# Altium PCB final pedal axial 03.PcbDoc
Units mm, origin at the board's own origin, x right, y up, seen from the top; angles counter-clockwise.
Board outline 77.25 x 121.25 mm, 2 copper layers (Top Layer, Bottom Layer); 65 components, 53 nets, 200 pads, 0 vias.
Unrouted connection lines stored in the file: 136.
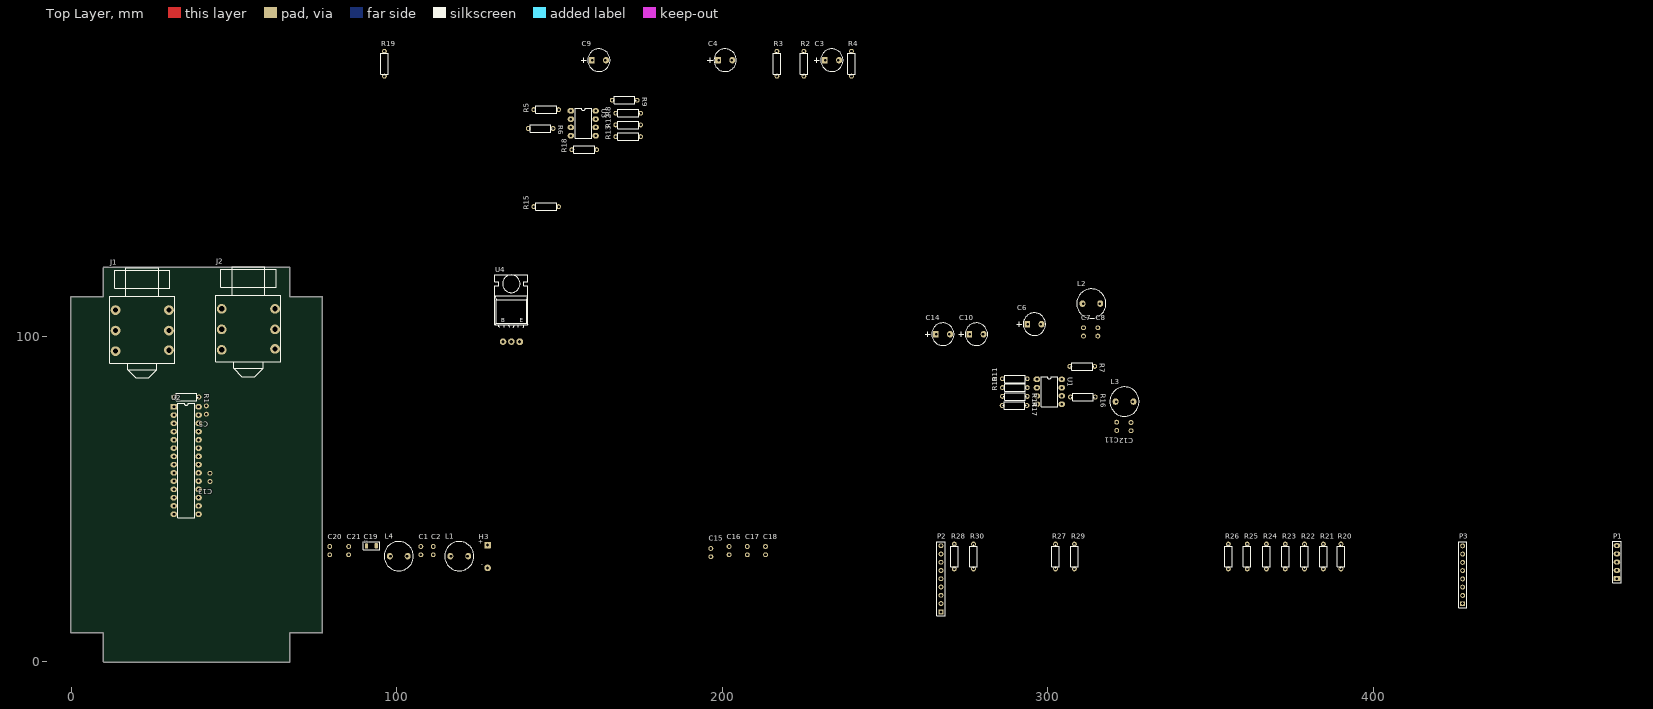
[diagram p0: Top Layer view]
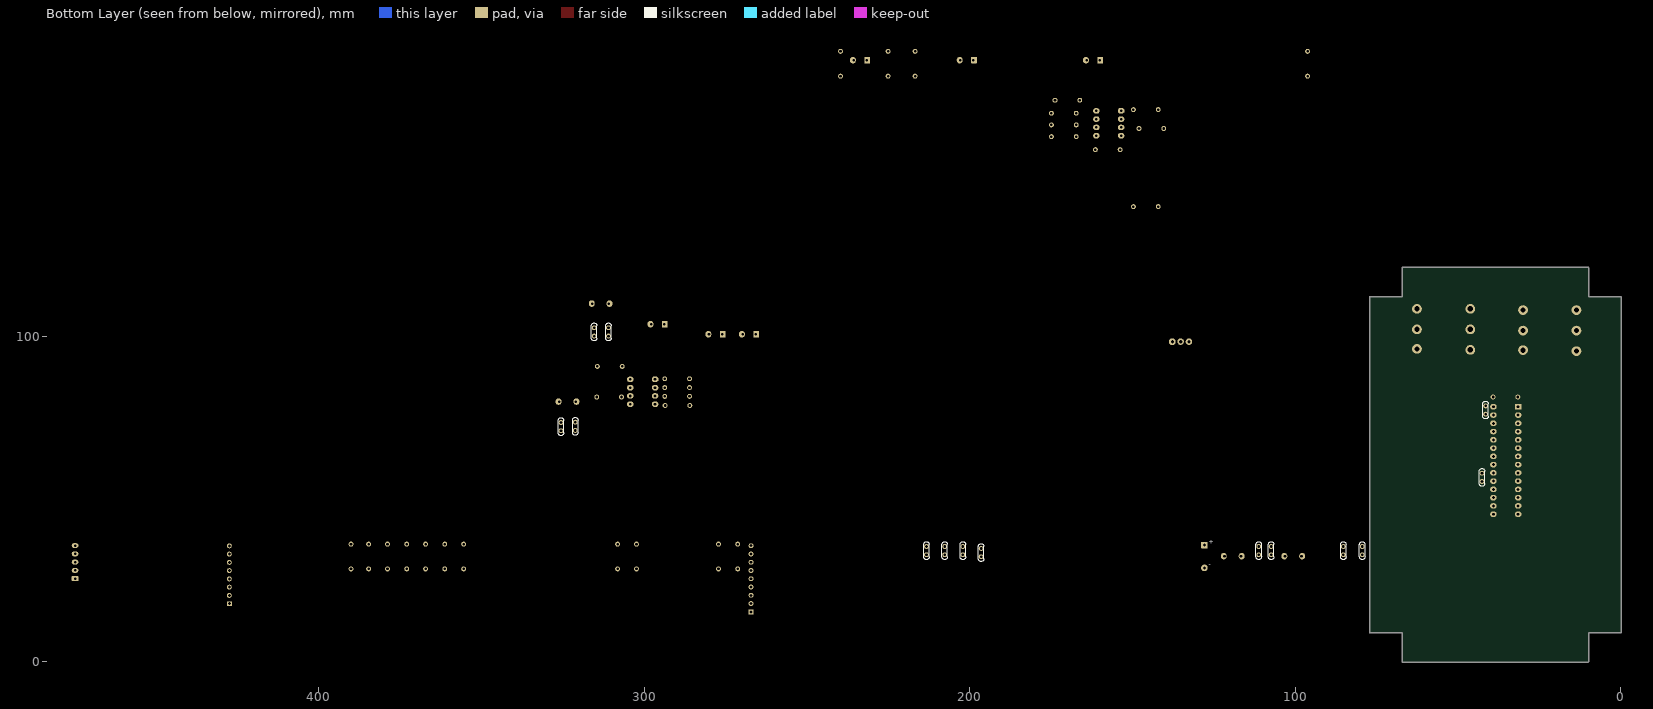
[diagram p1: Bottom Layer view, seen from below]

## Layer stack, top to bottom
Top Solder: solder mask 0.0102, Solder Resist, Dk 3.5
Top Layer: signal copper 0.0356
Dielectric 1: dielectric 0.32, FR-4, Dk 4.8
Bottom Layer: signal copper 0.0356
Bottom Solder: solder mask 0.0102, Solder Resist, Dk 3.5

## Board outline
9.873,0 9.873,8.873 0,8.873 cw(c0,9) -0.127,9 -0.127,112 cw(c0,112) 0,112.127 9.873,112.127 9.873,121 cw(c10,121) 10,121.127 67,121.127 cw(c67,121) 67.127,121 67.127,112.127 77,112.127 cw(c77,112) 77.127,112 77.127,9 cw(c77,9) 77,8.873 67.127,8.873 67.127,0 cw(c67,0) 67,-0.127 10,-0.127 cw(c10,0)

## Design rules (kind name [scope] priority, off if disabled: settings)
Clearance Clearance_1 [InNet('No Net') vs InNet('No Net')] p1: gap=1
Clearance [InNet('GND')] p2: gap=0.4
PlaneClearance [All] p1: clearance=0.3
PlaneConnect [All] p1: planeconnectstyle=Direct reliefexpansion=0.508 reliefentries=4 reliefconductorwidth=0.254 reliefairgap=0.254
PolygonConnect [All] p1: connectstyle=Relief reliefconductorwidth=0.6 reliefentries=4 polygonreliefangle="90 Angle" airgapwidth=0.254
RoutingVias [All] p1: holewidth=0.711 width=1.27 viastyle="Through Hole" minholewidth=0.711 minwidth=1.27 maxholewidth=0.711 maxwidth=1.27
SolderMaskExpansion [All] p1: expansion=0.102
Width [All] p1: maxlimit=0.4 minlimit=0.4 preferedwidth=0.4
28 further rules are at their usual default settings.

## Components (designator, comment, footprint, x,y, rotation, side; value= is the part's Value field where it differs from the comment)
C1 "100n" Cap-Disk-D5.5-R2.54 107.4,34.1 r90 top
C2 "100n" Cap-Disk-D5.5-R2.54 111.2,34.1 r90 top
C3 "10µ" CAPAE250P680X1220_VERT 233.699,184.8 r0 top
C4 "10µ" CAPAE250P680X1220_VERT 200.899,184.8 r0 top
C5 "100n" Cap-Disk-D5.5-R2.54 41.5,77.3 r270 top
C6 "10µ" CAPAE250P680X1220_VERT 295.9,103.7 r0 top
C7 "100n" Cap-Disk-D5.5-R2.54 310.999,101.3 r90 top
C8 "100n" Cap-Disk-D5.5-R2.54 315.399,101.3 r90 top
C9 "10µ" CAPAE250P680X1220_VERT 162.099,184.8 r0 top
C10 "10µ" CAPAE250P680X1220_VERT 278.099,100.6 r0 top
C11 "100n" Cap-Disk-D5.5-R2.54 321.2,72.3 r270 top
C12 "100n" Cap-Disk-D5.5-R2.54 325.6,72.2 r270 top
C13 "100n" Cap-Disk-D5.5-R2.54 42.6,56.6 r270 top
C14 "10µ" CAPAE250P680X1220_VERT 267.799,100.6 r0 top
C15 "100n" Cap-Disk-D5.5-R2.54 196.5,33.5 r90 top
C16 "100n" Cap-Disk-D5.5-R2.54 202.1,34.1 r90 top
C17 "100n" Cap-Disk-D5.5-R2.54 207.7,34.1 r90 top
C18 "100n" Cap-Disk-D5.5-R2.54 213.3,34.1 r90 top
C19 "10µ" R1206-1% 92.2,35.6 r0 top
C20 "100n" Cap-Disk-D5.5-R2.54 79.4,34.1 r90 top
C21 "100n" Cap-Disk-D5.5-R2.54 85.2,34.1 r90 top
H3 "BATTERY" HDR_1X2X276 127.9,32.3 r0 top
J1 "Phone-Jack 6.3mm Stereo SW" "Phone-Jack Stereo SW 6.3mm" 21.8,112.2 r0 top
J2 "Phone-Jack 6.3mm Stereo SW" "Phone-Jack Stereo SW 6.3mm" 54.4,112.6 r0 top
L1 "INDC_180u_Toroid" Dr-CW8A 119.2,32.4 r0 top
L2 "INDC_180u_Toroid" Dr-CW8A 313.4,110 r0 top
L3 "INDC_180u_Toroid" Dr-CW8A 323.6,79.9 r0 top
L4 "INDC_180u_Toroid" Dr-CW8A 100.6,32.4 r0 top
P1 "Programmer" HDR1X5_2.54MMP 474.899,25.5 r90 top
P2 "Header 9" HDR1X9 267.199,15.3 r90 top
P3 "Header 8" HDR1X8 427.499,17.8 r90 top
R1 "Thick Film" R0.25-300 35.4,81.3 r0 top
R2 "Thick Film" R0.25-300 225.099,183.7 r90 top
R3 "Thick Film" R0.25-300 216.799,183.7 r90 top
R4 "Thick Film" R0.25-300 239.699,183.7 r90 top
R5 "Thick Film" R0.25-300 145.9,169.6 r180 top
R6 "Thick Film" R0.25-300 144.2,163.8 r0 top
R7 "Thick Film" R0.25-300 310.6,90.7 r0 top
R8 "Thick Film" R0.25-300 171.1,168.5 r180 top
R9 "Thick Film" R0.25-300 170,172.5 r0 top
R10 "Thick Film" R0.25-300 289.9,84.2 r180 top
R11 "Thick Film" R0.25-300 289.9,86.9 r180 top
R12 "Thick Film" R0.25-300 171.1,164.9 r180 top
R13 "Thick Film" R0.25-300 171.1,161.3 r180 top
R14 "Thick Film" R0.25-300 289.9,81.5 r0 top
R15 "Thick Film" R0.25-300 145.9,139.8 r180 top
R16 "Thick Film" R0.25-300 310.8,81.3 r0 top
R17 "Thick Film" R0.25-300 289.8,78.7 r0 top
R18 "Thick Film" R0.25-300 157.6,157.3 r180 top
R19 "Thick Film" R0.25-300 96.199,183.7 r90 top
R20 "Thick Film" R0.25-300 390.099,32.3 r90 top
R21 "Thick Film" R0.25-300 384.699,32.3 r90 top
R22 "Thick Film" R0.25-300 378.899,32.3 r90 top
R23 "Thick Film" R0.25-300 372.999,32.3 r90 top
R24 "Thick Film" R0.25-300 367.199,32.3 r90 top
R25 "Thick Film" R0.25-300 361.299,32.3 r90 top
R26 "Thick Film" R0.25-300 355.499,32.3 r90 top
R27 "Thick Film" R0.25-300 302.399,32.3 r90 top
R28 "Thick Film" R0.25-300 271.299,32.3 r90 top
R29 "Thick Film" R0.25-300 308.199,32.3 r90 top
R30 "Thick Film" R0.25-300 277.199,32.3 r90 top
U1 "OPA2350" DIL8-300a 300.5,82.9 r270 top
U2 "DSPIC33FJ128GP802-I/SP" DIP28-300 35.3,61.8 r0 top
U3 "OPA2350" DIL8-300a 157.3,165.4 r270 top
U4 "LM117 3v3" TO220-RB-650 135.2,116.1 r0 top

## Footprints (in the part's own frame and the unit in brackets; to place one, negate y for a bottom-side part, rotate by r counter-clockwise, add the part's x,y. Pads: shape width x height; smd on the part's side, far side on the other; paste and mask are expansions set on the pad)
Cap-Disk-D5.5-R2.54 [mm]
  round 1.5 hole 0.8: 1(1.27,0) 2(-1.27,0)
  body extent -2.75,-0.86 2.75,0.86, height 6.25
CAPAE250P680X1220_VERT [mm]
  round 0.508 on Mech15: 0(0,0)
  rrect25% 1.8x2 hole 0.8 copper offset -0.2,0: 1(-2,0)
  oval 1.8x2 hole 0.8 copper offset 0.2,0: 2(2,0)
  silkscreen extent -5.45,-3.46 3.46,3.46, body extent -3.37,-3.37 3.37,3.37, height 12.2
DIL8-300a [mm]
  oct 1.7x2 hole 0.8: 1(-3.81,-3.81)
  oval 1.7x2 hole 0.8: 2(-1.27,-3.81) 3(1.27,-3.81) 4(3.81,-3.81) 5(3.81,3.81) 6(1.27,3.81) 7(-1.27,3.81) 8(-3.81,3.81)
  silkscreen extent -4.58,-2.54 4.58,2.54, body extent -4.58,-3.96 4.58,3.96, height 3.88
DIP28-300 [mm] "DIP 28 Leads, Row Spacing 7.62mm; Pitch 2.54mm"
  rect 2x1.7 hole 0.9: 1(-3.81,16.51)
  oval 2x1.7 hole 0.9: 2(-3.81,13.97) 3(-3.81,11.43) 4(-3.81,8.89) 5(-3.81,6.35) 6(-3.81,3.81) 7(-3.81,1.27) 8(-3.81,-1.27) 9(-3.81,-3.81) 10(-3.81,-6.35) 11(-3.81,-8.89) 12(-3.81,-11.43) 13(-3.81,-13.97) 14(-3.81,-16.51) 15(3.81,-16.51) 16(3.81,-13.97) 17(3.81,-11.43) 18(3.81,-8.89) 19(3.81,-6.35) 20(3.81,-3.81) 21(3.81,-1.27) 22(3.81,1.27) 23(3.81,3.81) 24(3.81,6.35) 25(3.81,8.89) 26(3.81,11.43) 27(3.81,13.97) 28(3.81,16.51)
  silkscreen extent -2.65,-17.59 2.65,17.59, body extent -3.93,-17.59 3.94,17.59, height 4.57
Dr-CW8A [mm]
  oval 1.8x2 hole 0.8 copper offset -0.2,0: 1(-2.54,0)
  oval 1.8x2 hole 0.8 copper offset 0.2,0: 2(2.54,0)
  silkscreen extent -4.5,-4.5 4.5,4.5, body extent -4.5,-4.5 4.5,4.5, height 13.27
HDR1X5_2.54MMP [mil] "Connector; Header; 5 Position 0.100\" pitch"
  rrect25% 60x80 hole 30: 1(0,0)
  oval 60x80 hole 30: 2(100,0) 3(200,0) 4(300,0) 5(400,0)
  silkscreen extent -50,-50 450,50
HDR1X8 [mm] "Connector; Header; 8 Position"
  rect 1.5x1.5 hole 0.9: 1(0,0)
  round 1.5 hole 0.9: 2(2.54,0) 3(5.08,0) 4(7.62,0) 5(10.16,0) 6(12.7,0) 7(15.24,0) 8(17.78,0)
  silkscreen extent -1.27,-1.27 19.05,1.27
HDR1X9 [mm] "Connector; Header; 9 Position"
  rect 1.5x1.5 hole 0.9: 1(0,0)
  round 1.5 hole 0.9: 2(2.54,0) 3(5.08,0) 4(7.62,0) 5(10.16,0) 6(12.7,0) 7(15.24,0) 8(17.78,0) 9(20.32,0)
  silkscreen extent -1.27,-1.27 21.59,1.27
HDR_1X2X276 [mil]
  rrect25% 80x80 hole 38: 1(0,137.8)
  round 80 hole 38: 2(0,-137.8)
  body extent -20,-158 20,158
"Phone-Jack Stereo SW 6.3mm" [mm] "SJ-6306"
  round 3 hole 1.6: 1(-8.2,-16.8) 2(-8.2,-10.5) 3(-8.2,-4.2) 4(8.2,-4.2) 5(8.2,-10.5) 6(8.2,-16.5)
  silkscreen extent -10,-25 10,8.8, body extent -9.01,-23.73 9.19,8.06, height 16
R0.25-300 [mm]
  round 1.5 hole 0.8: 1(-3.81,0) 2(3.81,0)
  silkscreen extent -3.56,-1.15 3.56,1.15, body extent -4.11,-1.15 4.11,1.15, height 2.3
R1206-1% [mm]
  rrect50% 1x1.6 smd: 1(-1.5,0) 2(1.5,0)
  silkscreen extent -2.5,-1.25 2.5,1.25, body extent -1.65,-0.81 1.55,0.79, height 0.6
TO220-RB-650 [mm]
  round 0 hole 4 unplated: 0(0,0)
  round 2 hole 1: 1(-2.54,-17.78) 2(0,-17.78)
  oct 2x2 hole 1: 3(2.54,-17.78)
  silkscreen extent -5.08,-13.36 5.08,2.71, body extent -5.08,-17.97 5.08,2.58, height 1.72

## Part data
C1 C2 C5 C7 C8 C11 C12 C13 C15 C16 C17 C18 C20 C21: library part CAPC_100n_1206_NP0_50V_5%, "Capacitor SMD Cer 100nF 1206 NP0 50V 5%"
C3 C4 C6 C9 C10 C14 C19: library part CAPT_330u_2917_6V3, "Capacitor SMD Tant 330uF 20% 6V3 2917"
H3: library part Header2P, "Header, 2-pin"
L1 L2 L3 L4: "Power Inductor 180µH 10% SMD Toroid"
P1: library part Header5P, "Header 5-pin"
P2: "Header, 9-Pin"
P3: "Header, 8-Pin"
R1 R2 R3 R4 R5 R6 R7 R8 R9 R10 R11 R12 R13 R14 R15 R16 R17 R18 R19 R20 R21 R22 R23 R24 R25 R26 R27 R28 R29 R30: library part RES_1M_0805_5%, "Resistor SMD chip 1M Ohm 0.125W 5% 0805"
U1 U3: library part OPA2313ID, "1-MHz, Micropower, Low-Noise, Rail-to-Rail I/O Operational Amplifier, 1.8 to 5.5 V, -40 to 125 degC, 8-pin SOIC (D8), Green (RoHS & no Sb/Br)"
U2: "High-Performance 16-bit Digital Signal Controller, 128 KB Flash, 16 KB RAM, 28-Pin SPDIP, Industrial Temperature"
U4: library part TL317CLP, "Adjustable Regulator with 5 to 38 V Input and 1.2 to 32 V Output, 0 to 125 degC, 3-Pin TO-92 (LP), Pb-Free (RoHS)"

## Nets (pads, with @x,y where several pads share a name; then routed paths per layer and width w, separated by ;. In a path a pad name is that pad's centre, name@x,y a point inside that pad or via, vN(x,y) a via of type N, cw(c..) or ccw(c..) an arc to the next point about the centre after c; other vN are vias at no path point)
AGND: C1.1 C4.2 C5.1 C7.1 C8.1 C10.1 C11.1 C12.1 J1.3 J1.4 J2.3 J2.4 L4.1 R3.2 R8.2 R14.2 R18.2 U1.4 U2.27 U3.4
"AUDIO IN LEFT": C6.1 J1.1
"AUDIO IN RIGHT": C14.1 J1.2
BUT1: C15.2 P2.5 R27.1 U2.9
BUT2: C16.2 P2.6 R28.1 U2.10
BUT3: C17.2 P2.7 R29.1 U2.11
BUT4: C18.2 P2.8 R30.1 U2.12
D1: R26.1 U2.14
D2: R25.1 U2.15
D3: R24.1 U2.16
D4: R23.1 U2.17
D5: R22.1 U2.18
D6: R21.1 U2.21
D7: R20.1 U2.22
DAC1A: R15.1 U2.23
DAC1B: R13.1 U2.24
DAC2A: R6.2 U2.25
DAC2B: R4.2 U2.26
GND: C2.1 C13.1 C15.1 C16.1 C17.1 C18.1 C19.2 C20.1 C21.1 H3.2 L4.2 P1.5 P2.3 P3.6 U2.8 U2.19 U4.1
"LEFT BUFFER": C8.2 L2.2 U2.2
MCLR: P1.1 R1.1 U2.1
NetC3_2: C3.2 R3.1 R5.1 U3.1
NetC4_1: C4.1 R2.1 R8.1 R9.2 R12.1
NetC6_2: C6.2 R10.1 U1.3
NetC7_2: C7.2 L2.1 R7.2
NetC9_2: C9.2 R18.1 R19.1 U3.7
NetC10_2: C10.2 R10.2 R11.2 R14.1 R17.1
NetC11_2: C11.2 L3.1 R16.2
NetC13_2: C13.2 U2.20
NetC14_2: C14.2 R17.2 U1.5
NetP3_1: P3.1 R26.2
NetP3_2: P3.2 R25.2
NetP3_3: P3.3 R24.2
NetP3_4: P3.4 R23.2
NetP3_5: P3.5 R22.2
NetP3_7: P3.7 R21.2
NetP3_8: P3.8 R20.2
NetR2_2: R2.2 R4.1 U3.3
NetR5_2: R5.2 R6.1 U3.2
NetR7_1: R7.1 U1.1 U1.2
NetR12_2: R12.2 R13.2 U3.5
NetR15_2: R15.2 R19.2 U3.6
NetR16_1: R16.1 U1.6 U1.7
OUT1: C3.1 J2.2
OUT2: C9.1 J2.1
PGEC: P1.3 U2.5
PGED: P1.2 U2.4
"RIGHT BUFFER": C12.2 L3.2 U2.3
RX: P2.1 U2.6
TX: P2.2 U2.7
VCC: C20.2 H3.1 P2.4 U4.3
"VCC ANA": C1.2 C5.2 L1.1 R9.1 R11.1 U1.8 U2.28 U3.8
"VCC DIGI": C2.2 C19.1 C21.2 L1.2 P1.4 P2.9 R1.2 R27.2 R28.2 R29.2 R30.2 U2.13 U4.2
pads on no net: C3.0 C4.0 C6.0 C9.0 C10.0 C14.0 J1.5 J1.6 J2.5 J2.6 U4.0

## Text inside footprints (layer, text, board x,y; h text height)
C19: Top Overlay "1%" at 89.95,36.35 h0.5
H3: Top Overlay "-" at 126.6,28.8 h2.29; Top Overlay "+" at 126.6,35.8 h2.29; Bottom Overlay "+" at 126.6,35.8 h2.29; Bottom Overlay "-" at 126.6,28.8 h2.29
U4: Top Overlay "E" at 137.74,104.289 h1.27; Top Overlay "B" at 132.152,104.289 h1.27